# Altium PCB robotShield_PCB.PcbDoc
Units mm, origin at the board's own origin, x right, y up, seen from the top; angles counter-clockwise.
Board outline 80 x 60 mm, 2 copper layers (Top Layer, Bottom Layer), stack 1.541 mm thick; 63 components, 39 nets, 212 pads, 127 vias.
Unrouted connection lines stored in the file: 53.
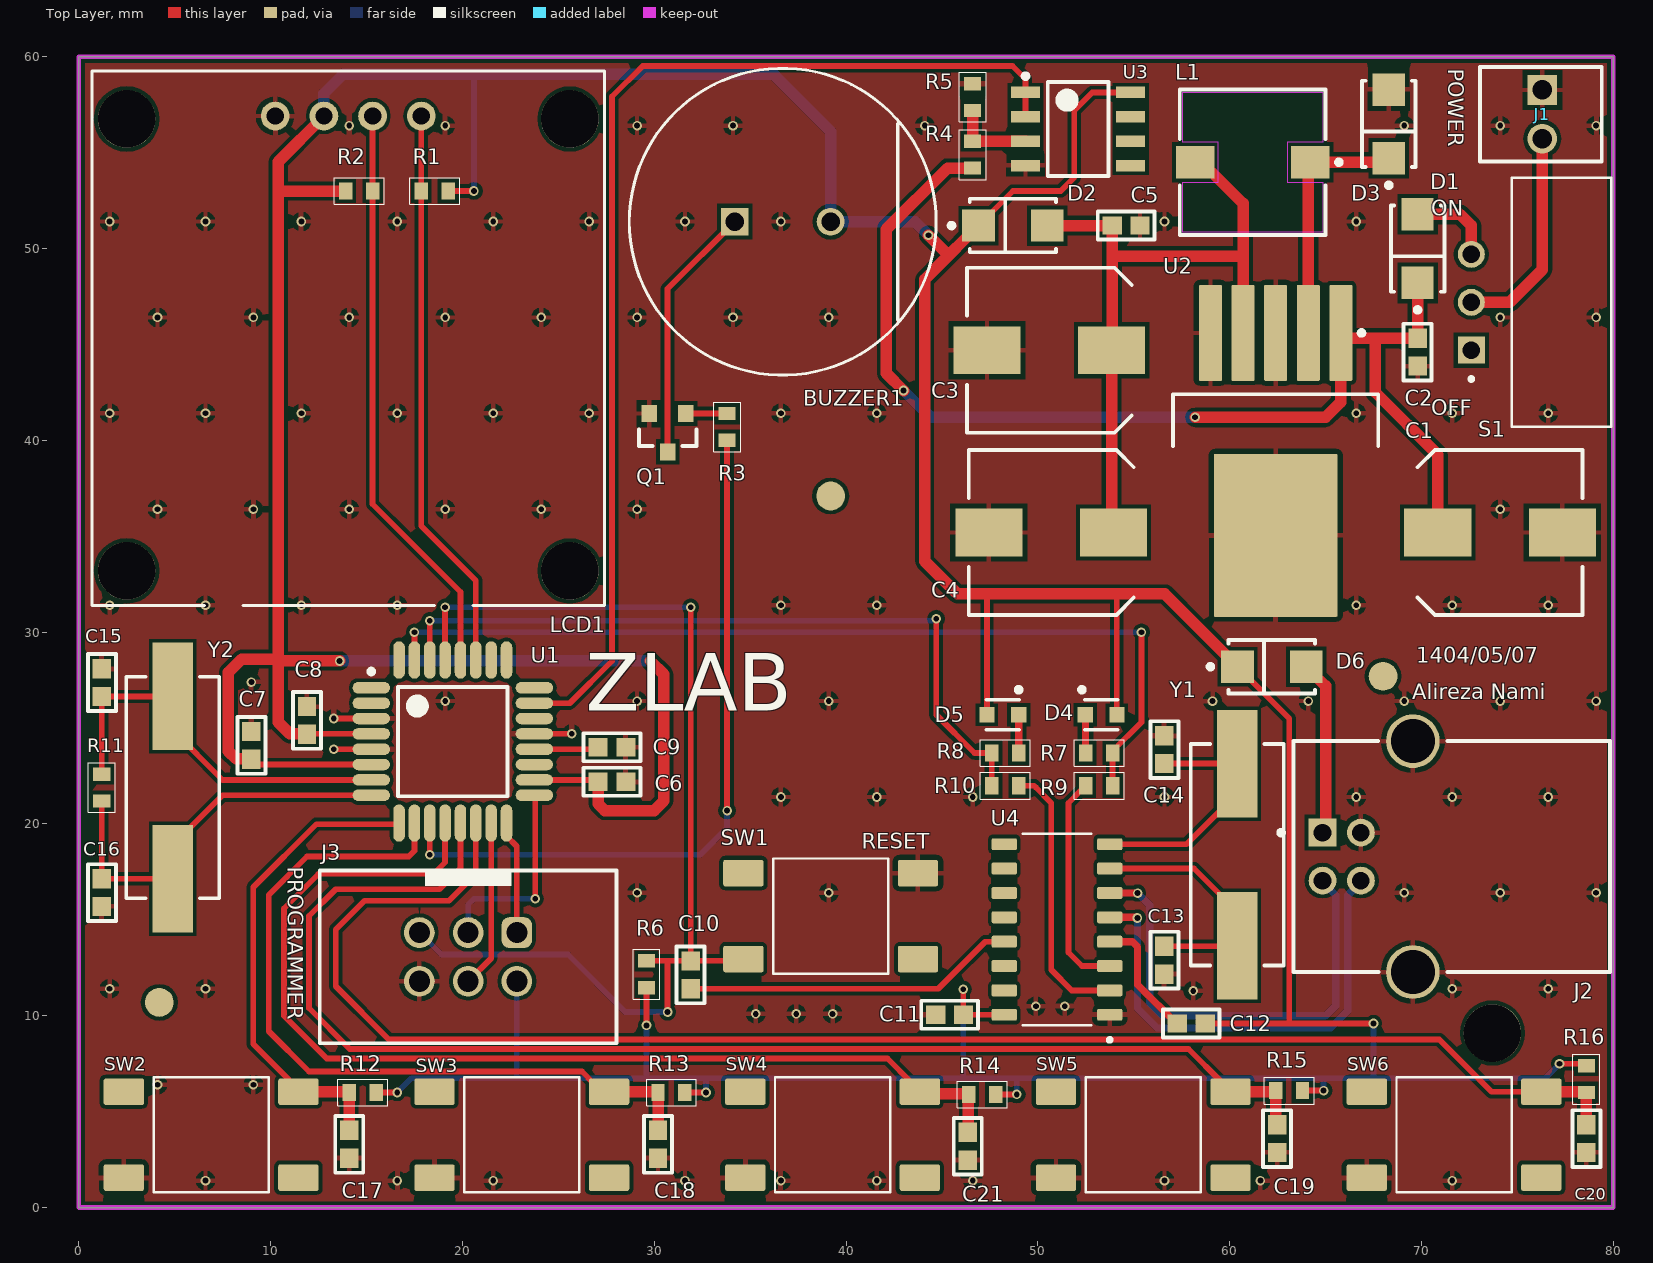
[diagram p0: Top Layer view]
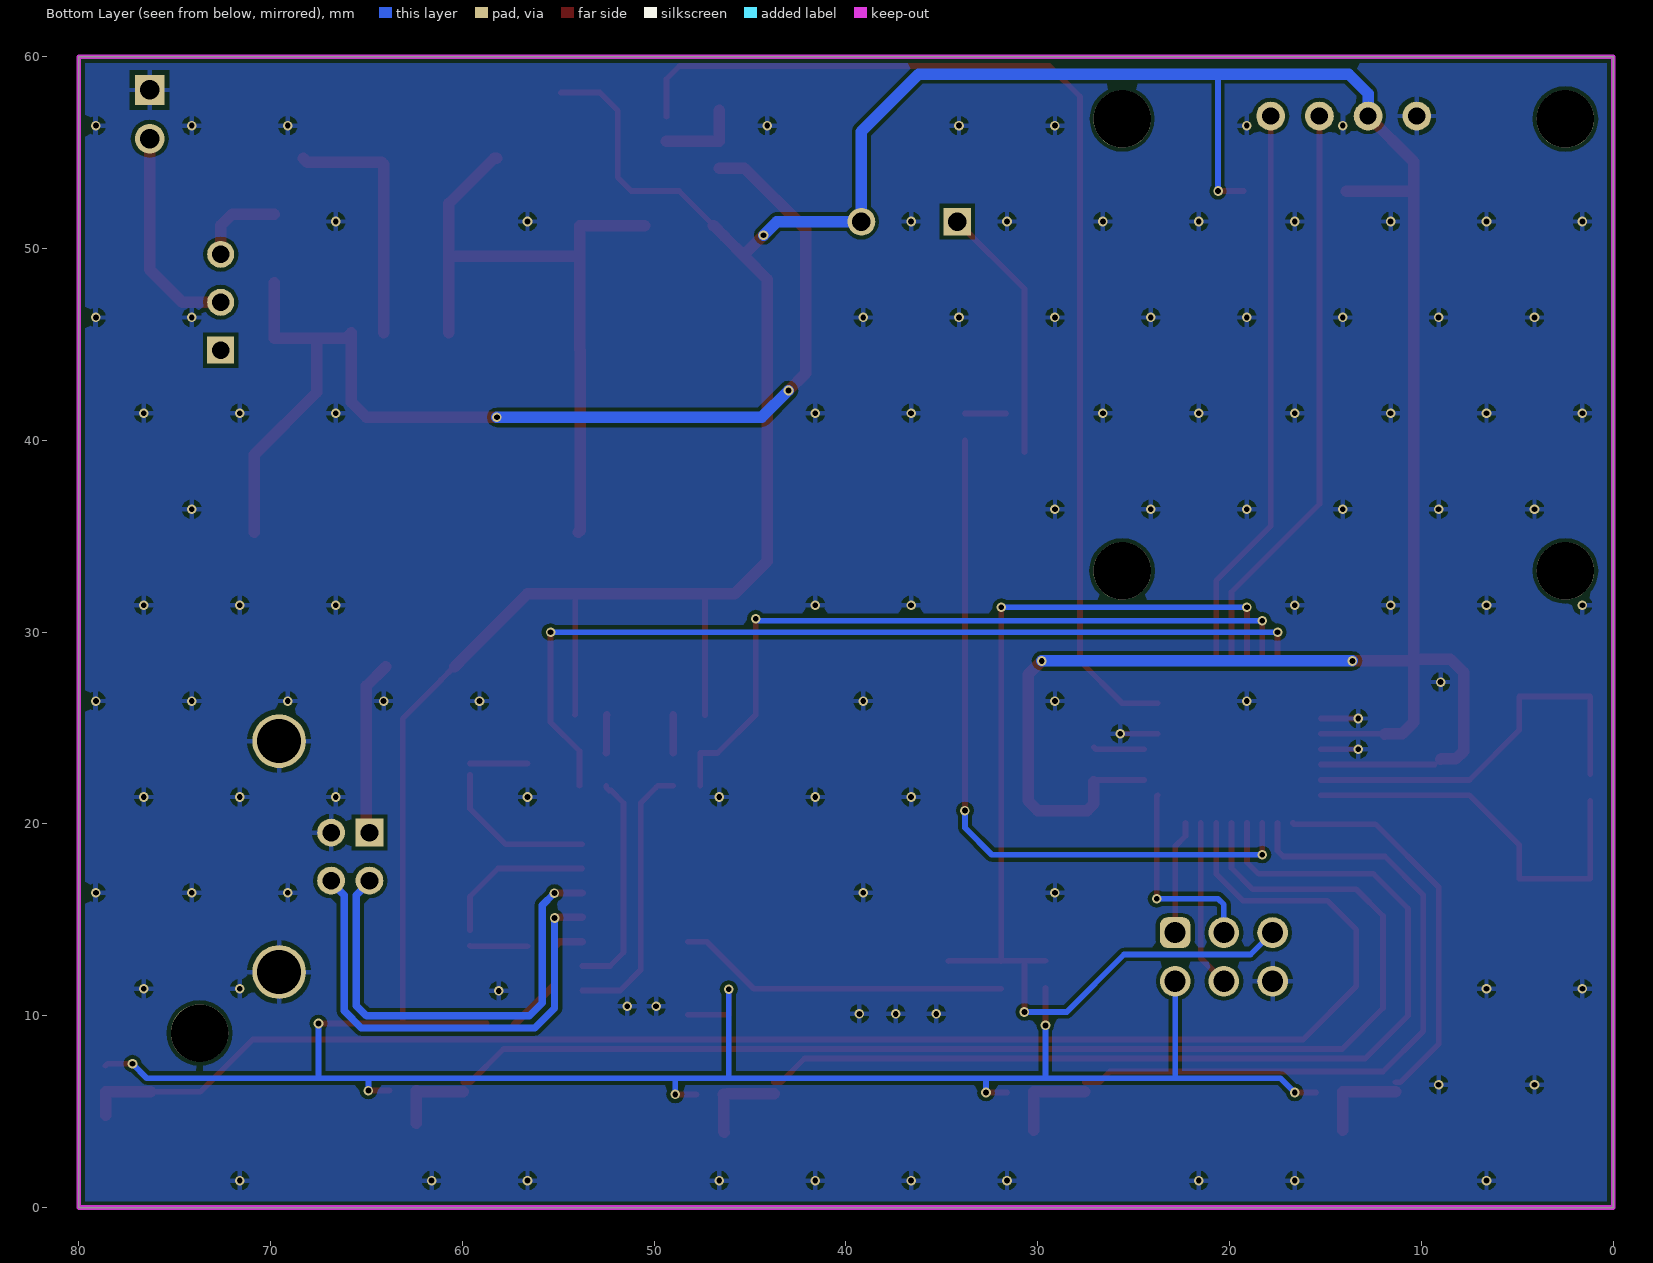
[diagram p1: Bottom Layer view, seen from below]
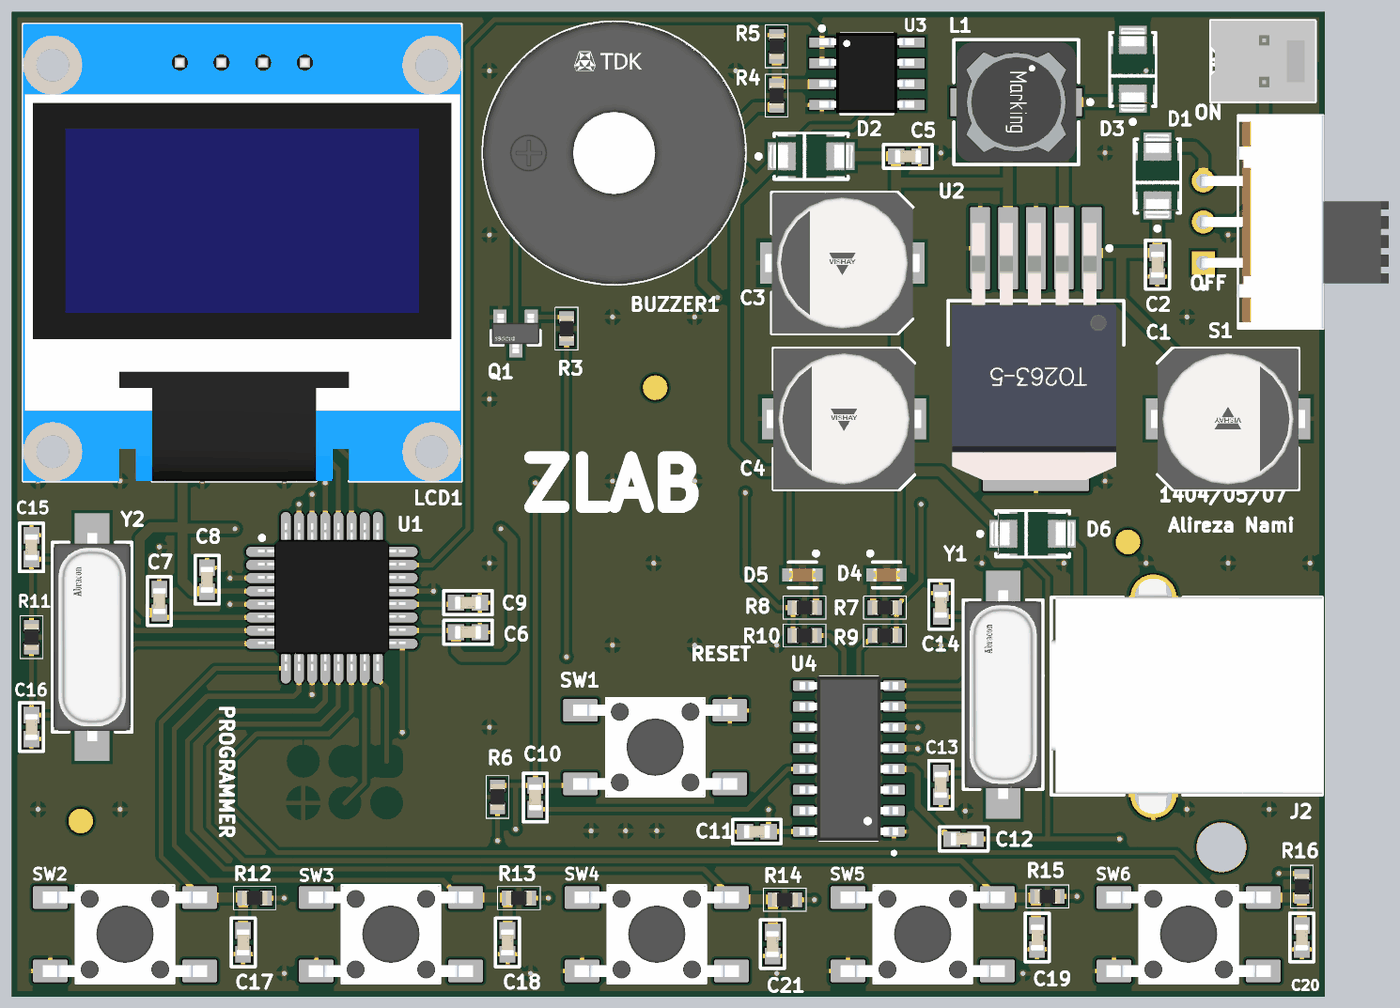
[diagram p2: 3D render of the assembled board from above, using the file's embedded part models]

## Layer stack, top to bottom
Top Solder: solder mask 0.0102, Solder Resist, Dk 3.5
Top Layer: signal copper 0.0356
Dielectric 1: dielectric 1.4696, FR-4, Dk 4.8
Bottom Layer: signal copper 0.0356
Bottom Solder: solder mask 0.0102, Solder Resist, Dk 3.5

## Board outline
0,0 0,60 80,60 80,0

## Design rules (kind name [scope] priority, off if disabled: settings)
Clearance [All] p1: gap=0.2 ignorepadtopadclearanceinfootprint=FALSE
DiffPairsRouting [All] p1: maxlimit=0.254 minlimit=0.254 mostfreqgap=0.254 toplayer_minwidth=0.381 toplayer_maxwidth=0.381 toplayer_prefwidth=0.381 bottomlayer_minwidth=0.381 bottomlayer_maxwidth=0.381 bottomlayer_prefwidth=0.381 maxuncoupledlength=12.7
HoleSize [All] p1: absolutevalues=TRUE maxlimit=3 minlimit=0.2 maxpercent=80.000 minpercent=20.000
MinimumSolderMaskSliver [All] p1: minsoldermaskwidth=0.05
PolygonConnect [All] p1: connectstyle=Relief reliefconductorwidth=0.254 reliefentries=4 polygonreliefangle="90 Angle" airgapwidth=0.254
RoutingVias [All] p1: holewidth=0.3 width=0.5 viastyle="Through Hole" minholewidth=0.3 minwidth=0.5 maxholewidth=0.4 maxwidth=0.6
SilkToSolderMaskClearance [IsPad] p1: minsilkscreentomaskgap=0.05 clearancetoexposedcopper=TRUE
SolderMaskExpansion [All] p1: expansion=0.102 istentingtop=FALSE
SupplyNets "Schematic Supply Nets_2" [InNet('GND')] p1: voltage=0.000
SupplyNets "Schematic Supply Nets_1" [InNet('+12V')] p2: voltage=0.000
SupplyNets "Schematic Supply Nets" [InNet('+5V')] p3: voltage=0.000
Width [All] p1: maxlimit=0.6 minlimit=0.3 preferedwidth=0.3
26 further rules are at their usual default settings.

## Classes and differential pairs
differential pair UD: +UD_P -UD_N

## Components (designator, comment, footprint, x,y, rotation, side; value= is the part's Value field where it differs from the comment)
BUZZER1 "SDC1610M5-01" BUZZER 36.7,51.4 r0 top
C1 "MAL215376101E3" CE-8X10MM 74.1,35.2 r180 top
C2 "CGA3E2X7R1H104K080AA" C0603 69.8,44.6 r270 top
C3 "MAL215376101E3" CE-8X10MM 50.6,44.7 r0 top
C4 "MAL215376101E3" CE-8X10MM 50.7,35.2 r0 top
C5 "CGA3E2X7R1H104K080AA" C0603 54.6,51.2 r0 top
C6 "CGA3E2X7R1H104K080AA" C0603 27.8,22.2 r0 top
C7 "CGA3E2X7R1H104K080AA" C0603 9,24.1 r90 top
C8 "CGA3E2X7R1H104K080AA" C0603 11.9,25.4 r90 top
C9 "CGA3E2X7R1H104K080AA" C0603 27.8,24 r180 top
C10 "CGA3E2X7R1H104K080AA" C0603 31.9,12.134 r90 top
C11 "CGA3E2X7R1H104K080AA" C0603 45.4,10.055 r180 top
C12 "CGA3E2X7R1H104K080AA" C0603 58,9.6 r0 top
C13 "C0603C160J3GACTU" C0603 56.6,12.9 r90 top value=16pF
C14 "C0603C160J3GACTU" C0603 56.6,23.876 r270 top value=16pF
C15 "C0603C180J3GACTU" C0603 1.204,27.376 r90 top value=18pF
C16 "C0603C180J3GACTU" C0603 1.204,16.424 r270 top value=18pF
C17 "CGA3E2X7R1H104K080AA" C0603 14.1,3.3 r270 top
C18 "CGA3E2X7R1H104K080AA" C0603 30.2,3.3 r270 top
C19 "CGA3E2X7R1H104K080AA" C0603 62.475,3.6 r270 top
C20 "CGA3E2X7R1H104K080AA" C0603 78.6,3.6 r270 top
C21 "CGA3E2X7R1H104K080AA" C0603 46.35,3.2 r270 top
D1 "MRA4007T3G" SMA 69.8,50 r90 top
D2 "SS14" SMA 48.7,51.2 r0 top
D3 "SS14" SMA 68.3,56.5 r90 top
D4 "SML-D12U1WT86" LED_RED_0603 53.3,25.7 r0 top
D5 "SML-D12U1WT86" LED_RED_0603 48.175,25.688 r180 top
D6 "SS14" SMA 62.2,28.2 r0 top
J1 "2Pin" MOLX-2P-2.54MM 76.3,57 r270 top
J2 "A-USBSB" USBS-B 67.2,18.3 r90 top
J3 "61200621621" ICSP -1249.7,-1256.93 r180 top
L1 "SRR0745A-331M" WE-PD_7332R 61.2,54.5 r270 top value=330uH
LCD1 "OLED-0.96Inch" OLED 2.5,33.2 r0 top
Q1 "MMBT2222A-7-F" SOT23 30.7,40.4 r270 top
R1 "RC0603JR-0710KL" R0603 18.56,53 r0 top value=10K
R2 "RC0603JR-0710KL" R0603 14.62,53 r180 top value=10K
R3 "RC0603JR-071KL" R0603 33.8,40.7 r270 top
R4 "RC0603JR-0720KL" R0603 46.6,54.9 r270 top value=20K
R5 "RC0603JR-0710KL" R0603 46.6,57.9 r270 top value=10K
R6 "RC0603JR-0710KL" R0603 29.6,12.16 r270 top value=10K
R7 "RC0603JR-071KL" R0603 53.2,23.7 r180 top
R8 "RC0603JR-071KL" R0603 48.3,23.7 r0 top
R9 "RC0603JR-071KL" R0603 53.2,22 r0 top
R10 "RC0603JR-071KL" R0603 48.3,22 r180 top
R11 "RC0603JR-071ML" R0603 1.204,21.9 r90 top value=1M
R12 "RC0603JR-0710KL" R0603 14.8,6 r0 top value=10K
R13 "RC0603JR-0710KL" R0603 30.9,6 r0 top value=10K
R14 "RC0603JR-0710KL" R0603 47.1,5.9 r0 top value=10K
R15 "RC0603JR-0710KL" R0603 63.1,6.1 r0 top value=10K
R16 "RC0603JR-0710KL" R0603 78.6,6.7 r90 top value=10K
S1 "Slide Switch" SLIDE_SWITCH_RIGHT 72.6,44.7 r90 top
SW1 "222AMVBAR" TS_6X6X5 39.2,15.2 r0 top
SW2 "222AMVBAR" TS_6X6X5 6.9,3.8 r180 top
SW3 "222AMVBAR" TS_6X6X5 23.1,3.8 r180 top
SW4 "222AMVBAR" TS_6X6X5 39.3,3.8 r180 top
SW5 "222AMVBAR" TS_6X6X5 55.5,3.8 r180 top
SW6 "222AMVBAR" TS_6X6X5 71.7,3.8 r180 top
U1 "ATmega328P-AU" TQFP32 19.5,24.3 r0 top
U2 "LM2575SX-5.0/NOPB" DPAK-5 62.4,39.302 r270 top
U3 "LM358ADR2G" SOIC-8 52.1,56.235 r0 top
U4 "CH340G" SOIC-16 51,14.5 r180 top
Y1 "LFXTAL003210BULK" XTAL-SMD 60.4,18.4 r90 top
Y2 "ABLS-16.000MHZ-K4T" XTAL-SMD 4.9,21.9 r90 top

## Footprints (in the part's own frame and the unit in brackets; to place one, negate y for a bottom-side part, rotate by r counter-clockwise, add the part's x,y. Pads: shape width x height; smd on the part's side, far side on the other; paste and mask are expansions set on the pad)
BUZZER [mm]
  rect 1.45x1.45 hole 0.95 paste-2539.97 mask+0: 1(-2.5,0)
  round 1.45 hole 0.95 paste-2539.97 mask+0: 2(2.5,0)
  silkscreen extent -8,-8 8,8, body extent -8.1,-8.1 8.1,8.1, height 0.25
C0603 [mm]
  rect 1.007x0.958 smd paste+0 mask+0.105: 1(-0.726,0) 2(0.726,0)
  silkscreen extent -1.48,-0.73 1.48,0.73, body extent -1.48,-0.73 1.48,0.73, height 0.25
CE-8X10MM [mm]
  rect 3.5x2.5 smd paste+0 mask+0: 1(-3.25,0) 2(3.25,0)
  silkscreen extent -4.3,-4.3 4.3,4.3, body extent -5.1,-4.4 5.1,4.4, height 0.25
DPAK-5 [mm] "DPAK, 5-Leads, Body 10.65x9.65mm, Pitch 1.7mm, IPC Low Density"
  rrect10% 5x1.2 smd: 1(-6.3,3.4) 2(-6.3,1.7) 3(-6.3,0) 4(-6.3,-1.7) 5(-6.3,-3.4)
  rrect2% 8.5x6.45 smd: 6(4.25,0)
  silkscreen extent -6.42,-5.35 -0.4,5.35, body extent -7.84,-5.1 7.83,4.9, height 4.81
ICSP [mm] "6 pins, straight, gold plating"
  rrect50% 1.6x1.6 hole 1.1: 1(-1272.54,-1271.27)
  round 1.6 hole 1.1: 2(-1272.54,-1268.73) 3(-1270,-1271.27) 4(-1270,-1268.73) 5(-1267.46,-1271.27) 6(-1267.46,-1268.73)
  silkscreen extent -1277.74,-1274.5 -1262.26,-1265.5, body extent -1277.64,-1274.43 -1262.36,-1265.25, height 9.13
LED_RED_0603 [mm]
  rect 0.8x0.8 smd paste+0 mask+0: 1(-0.825,0) 2(0.825,0)
  silkscreen extent -1.12,-0.79 0.85,1.42, body extent -1.33,-0.55 1.33,0.55, height 0.25
MOLX-2P-2.54MM [mm] "THD, 2-Leads, Body 6.35x4.93mm, Pitch 2.54mm"
  rect 1.55x1.55 hole 1.02: 1(-1.27,0)
  round 1.55 hole 1.02: 2(1.27,0)
  silkscreen extent -2.46,-3.25 2.46,3.1, body extent -2.46,-3.25 2.46,3.1, height 10.66
OLED [mm]
  round 1.5 hole 0.9: 1(7.741,23.709) 2(10.281,23.709) 3(12.82,23.709) 4(15.36,23.709)
  round 3 hole 3 mask+0: ""(0,0) ""(0,23.56) ""(23.1,0) ""(23.1,23.56)
  silkscreen extent -1.8,-1.8 24.9,26.06, body extent -1.8,-1.8 24.9,26.06, height 5.07
R0603 [mm] "Chip Resistor, 2-Leads, Body 1.70x0.90mm, IPC Medium Density"
  rect 0.7x0.9 smd: 1(-0.7,0) 2(0.7,0)
  silkscreen extent -1.3,-0.7 1.3,0.7, body extent -0.77,-0.43 0.77,0.43, height 0.46
SLIDE_SWITCH_RIGHT [mm]
  rect 1.408x1.408 / inner round 1.408 / far side rect 1.408x1.408 hole 0.9: 1(0,0)
  round 1.408 hole 0.9: 2(2.5,0) 3(5,0)
  silkscreen extent -4,-7.3 9,0.1, body extent -4,-11.3 9,0.2, height 6.1
SMA [mm]
  rect 1.7x1.68 smd paste+0 mask+0: 1(-1.79,0) 2(1.79,0)
  silkscreen extent -3.32,-1.4 2.25,1.4, body extent -2.74,-1.5 2.74,1.5, height 0.25
SOIC-8 [mm] "SOIC, 8-Leads, Body 4.9x3.9mm, Pitch 1.27mm"
  rect 1.52x0.6 smd: 1(-2.74,1.905) 2(-2.74,0.635) 3(-2.74,-0.635) 4(-2.74,-1.905) 5(2.74,-1.905) 6(2.74,-0.635) 7(2.74,0.635) 8(2.74,1.905)
  silkscreen extent -2.86,-2.45 1.58,2.88, body extent -2.89,-2.4 2.89,2.5, height 1.36
SOIC-16 [mm]
  rrect25% 1.31x0.62 smd: 1(-2.75,4.445) 2(-2.75,3.175) 3(-2.75,1.905) 4(-2.75,0.635) 5(-2.75,-0.635) 6(-2.75,-1.905) 7(-2.75,-3.175) 8(-2.75,-4.445) 9(2.75,-4.445) 10(2.75,-3.175) 11(2.75,-1.905) 12(2.75,-0.635) 13(2.75,0.635) 14(2.75,1.905) 15(2.75,3.175) 16(2.75,4.445)
  silkscreen extent -2.85,-5 1.78,5.85, body extent -3,-5 3,5, height 1.8
SOT23 [mm]
  rect 0.9x0.8 smd paste+0 mask+0: 1(-1,0.95) 2(-1,-0.95) 3(1,0)
  silkscreen extent -0.18,-1.5 0.7,1.5, body extent -1.55,-1.6 1.55,1.6, height 0.25
TQFP32 [mm] "Thin QFP, 32-Leads, Body 7x7mm, Pitch 0.8mm, IPC Low Density"
  oval 1.95x0.6 smd: 1(-4.25,2.8) 2(-4.25,2) 3(-4.25,1.2) 4(-4.25,0.4) 5(-4.25,-0.4) 6(-4.25,-1.2) 7(-4.25,-2) 8(-4.25,-2.8) 17(4.25,-2.8) 18(4.25,-2) 19(4.25,-1.2) 20(4.25,-0.4) 21(4.25,0.4) 22(4.25,1.2) 23(4.25,2) 24(4.25,2.8)
  oval 0.6x1.95 smd: 9(-2.8,-4.25) 10(-2,-4.25) 11(-1.2,-4.25) 12(-0.4,-4.25) 13(0.4,-4.25) 14(1.2,-4.25) 15(2,-4.25) 16(2.8,-4.25) 25(2.8,4.25) 26(2,4.25) 27(1.2,4.25) 28(0.4,4.25) 29(-0.4,4.25) 30(-1.2,4.25) 31(-2,4.25) 32(-2.8,4.25)
  silkscreen extent -4.37,-2.85 2.85,3.77, body extent -4.5,-4.45 4.5,4.55, height 1.1
TS_6X6X5 [mm]
  rrect15% 2.1x1.38 smd: 1(-4.55,2.24) 2(-4.55,-2.24) 3(4.55,2.24) 4(4.55,-2.24)
  silkscreen extent -3,-3 3,3, body extent -5,-3 5,3, height 5.07
USBS-B [mm] "USB-B, 4-Leads, Body 16.5x12.04mm"
  rect 1.45x1.45 hole 0.92: 1(1.25,2.355)
  round 1.45 hole 0.92: 2(-1.25,2.355) 3(-1.25,0.355) 4(1.25,0.355)
  round 2.8 hole 2.3: 5(6.02,-2.355) 6(-6.02,-2.355)
  silkscreen extent -6.02,-12.63 6.02,4.64, body extent -7.4,-12.65 7.5,3.85, height 11.01
WE-PD_7332R [mm] "SMT Shielded Power Inductor, 2-leads, body 7.3x7.3mm"
  rect 1.7x2 smd: 1(0,3) 2(0,-3)
  Top Layer keep-out region: 3.65,-3.65 1.05,-3.65 1.05,-1.8 -1.05,-1.8 -1.05,-3.65 -3.65,-3.65 -3.65,3.65 -1.05,3.65 -1.05,1.8 1.05,1.8 1.05,3.65 3.65,3.65
  silkscreen extent -3.8,-3.8 3.8,4.63, body extent -3.65,-3.65 3.65,3.65, height 3.22
XTAL-SMD [mm]
  rect 5.6x2.1 smd paste+0 mask+0: 1(-4.75,0) 2(4.75,0)
  silkscreen extent -5.77,-2.42 5.77,2.42, body extent -7.65,-2.52 7.65,2.52, height 0.25

## Part data
BUZZER1: library part BUZZER-5V, "AUDIO MAGNETIC INDICATOR 4-8V TH", Frequency=2.4kHz, Max Operating Temperature=70°C, Max Supply Current=30mA, Min Operating Temperature=-10°C, Nominal Supply Voltage (DC)=5V, Diameter=16mm, Height=10mm, Input Type=DC, Lead Free="Lead Free", Mount="Through Hole", Number of Pins=2, Number of Terminals/Pins=2, Operating Supply Current=30mA, Packaging=Tray, Sensing Method=Magnetic, Series=SDC, Termination="PC Pins", Voltage Rating=5V
C1 C3 C4: library part CE-100uF-25V, "MAL215376101E3 Cap Aluminum 100uF 25V 20% (8 X 10mm) SMD 0.5 Ohm 180mA 3000h 105C Blister T/R", Capacitance=100µF, Case/Package=Radial, Dielectric Material=Aluminium, ESR (Equivalent Series Resistance)=500mΩ, Leakage Current=22µA, Max Operating Temperature=105°C, Min Operating Temperature=-55°C, Ripple Current=180mA, Tolerance=20%, Voltage=25V, Diameter=8mm, Dissipation Factor=16%, Height=10mm, Height - Seated (Max)=10.4902mm, Lead Free="Lead Free", Life (Hours)=2000hours, Mount="Surface Mount", NexarPartId=42636023, Number of Pins=2, Packaging="Cut Tape", Polarity=Polar, Radiation Hardening=No, REACH SVHC=Unknown, Ripple Current (AC)=180mA, RoHS=Compliant, Schedule B="8532220020, 8532220020|8532220020, 8532220020|8532220020|8532220020, 8532220020|8532220020|8532220020|8532220020", Termination=SMD/SMT, Voltage Rating=25V, Voltage Rating (AC)=25V, Voltage Rating (DC)=25V, Width=8.6mm
C2 C5 C6 C7 C8 C9 C10 C11 C12 C17 C18 C19 C20 C21: library part 100N-50V-X7R-0603, "Cap Ceramic 100nF 50V X7R 10% Pad SMD 0603 +125°C Automotive T/R", Capacitance=100nF, Case Code (Imperial)=0603, Case Code (Metric)=1608, Dielectric=X7R, Max Operating Temperature=125°C, Min Operating Temperature=-55°C, Package Quantity=1, Ratings=AEC-Q200, Tolerance=10%, Voltage=50V, Case/Package=0603, Composition=Ceramic, Depth=0.8mm, Height=0.8mm, Lead Free="Lead Free", Length=1.6mm, Mount="Surface Mount", Packaging="Tape and Reel", Radiation Hardening=No, REACH SVHC="No SVHC", Termination=SMD/SMT, Thickness=0.035inch, Voltage Rating=50V, Voltage Rating (DC)=50V, Weight=7.1E-05oz, Width=0.8mm
C13 C14: library part 16P-25V-C0G-0603, "16 pF ±5% 25V Ceramic Capacitor C0G, NP0 0603 (1608 Metric)", Manufacturer=KEMET, Supplier Part Number=399-C0603C160J3GACTUTR-ND, Manufacturer Part Number=C0603C160J3GACTU, Pricing="4000=0.05638 (USD)", RoHS=No, Supplier=Digikey
C15 C16: library part 18P-25V-C0G-0603, "0603 (1608METRIC) Ceramic Capacitor SMD Comm C0G 25V 18PF ±5% C0G NP0", Case Code (Imperial)=0603, Case Code (Metric)=1608, Dielectric=C0G, Dielectric Material=Ceramic, Manufacturer=KEMET, Max Operating Temperature=125°C, Min Operating Temperature=-55°C, Package Quantity=4000, Supplier Part Number=80-C0603C180J3G, Temperature Coefficient=30ppm/°C, Tolerance=5%, Voltage Rating=25V, Case/Package=0603, Category="Ceramic Capacitors", ComponentLink1Description=https://datasheet.ciiva.com/23984/1723858-23984097.pdf?src-supplier=Newark, ComponentLink1URL=https://datasheet.ciiva.com/23984/1723858-23984097.pdf?src-supplier=Newark, ComponentLink2Description=https://datasheet.ciiva.com/22752/1907778-22752151.pdf?src-supplier=Element14, ComponentLink2URL=https://datasheet.ciiva.com/22752/1907778-22752151.pdf?src-supplier=Element14, ComponentLink3Description=https://datasheet.ciiva.com/28453/1907778-28453241.pdf?src-supplier=Element14, ComponentLink3URL=https://datasheet.ciiva.com/28453/1907778-28453241.pdf?src-supplier=Element14, ComponentLink4Description=https://datasheet.ciiva.com/5421/kem-c1003-c0g-smd-5421693.pdf?src-supplier=Mouser, ComponentLink4URL=https://datasheet.ciiva.com/5421/kem-c1003-c0g-smd-5421693.pdf?src-supplier=Mouser, Construction=Flat, Depth=0.8mm, Height=0.8mm, Lead Free="Lead Free", Lead Pitch=0.7mm, Length=1.6mm, Manufacturer Part Number=C0603C180J3GACTU, Material=Ceramic, Mounting Technology="Surface Mount", Packaging="Tape and Reel", Pricing="1=0.23, 10=0.131, 50=0.131, 100=0.078, 1000=0.053, 10000=0.039 (USD)", Radiation Hardening=No, Reach SVHC Compliant=No, RoHS=Yes, RoHS Compliant=Yes, Series=C, Stock=8329, Supplier=Mouser, Termination=SMD/SMT, Thickness=0.034inch, Voltage Rating (DC)=25V, Width=0.031inch
D1: library part M7, "Surface Mount Standard Recovery Power Rectifier, 2-Pin SMA, Pb-Free, Tape and Reel", Manufacturer="On Semiconductor", ComponentLink1Description="Manufacturer URL", ComponentLink1URL=http://www.onsemi.com/, ComponentLink2Description=Datasheet, ComponentLink2URL=http://www.onsemi.com/pub_link/Collateral/MRA4003T3-D.PDF, ComponentLink3Description="Package Specification", ComponentLink3URL=http://www.onsemi.com/pub_link/Collateral/403D-02.PDF, DatasheetVersion="Rev. 9", IFSM Max (A)=30, IO(rec) Max (A)=1, Mounting Technology="Surface Mount", PackageDescription="2-Pin Small Molded Package, J-Bend Lead, Body 2.605 x 4.315 mm", PackageReference=SMA-2-403D-02, PackageVersion="Rev. G, 07/2012", Packing="Tape and Reel", PartNumber=MRA4007T3G, RoHS=TRUE, Type="Standard Recovery", VRRM Max (V)=1000
D2 D3 D6: "DIODE SCHOTTKY 40V 1A DO214AC", Forward Current=1A, Manufacturer=Vishay, Manufacturer Part Number=SS14-E3/61T, Max Junction Temp=+150°C, Max Repetitive Reverse Voltage=40V, Max Surge Forward Current=40A, Package=95400, Peak Reverse Current=0.2mA, Temperature="-65°C to +150°C", Temperature Range Low=-65°C, Automotive=No, Category=Diode, ComponentLink2Description=Datasheet, ComponentLink2URL=http://www.vishay.com/docs/88746/ss12.pdf, Device Class L1="Discrete Semiconductors", Device Class L2=Diodes, Device Class L3="Schottky Diodes", Digikey Description="DIODE SCHOTTKY 40V 1A DO214AC", Footprint Url=http://www.vishay.com/docs/95400/sma.pdf, Height=2.29mm, Lead Free=Yes, Mouser Description="SS14 Series 40 V 1 A Surface Mount Schottky Barrier Rectifier - DO-214AC (SMA)", Octopart=https://octopart.com/ss14-e3%2F61t-vishay-39552847, RoHS=TRUE, Standoff Height=0mm, Temperature Range High=+150°C
D4 D5: library part LED_RED_0603, "LED RED DIFFUSED 1608 SMD", Colour=Red, Forward Current=20mA, Forward Voltage=2.2V, Manufacturer=Rohm, Package=SML-D12, Power Dissipation=54mW, Reverse Voltage=5V, Temperature="-40°C to +85°C", Temperature Range High=+85°C, Temperature Range Low=-40°C, Automotive=No, Category=Diode, ComponentLink2Description=Datasheet, ComponentLink2URL=https://www.rohm.com/datasheet/SML-D12U1W/sml-d12x1-e, Device Class L1=Optoelectronics, Device Class L2=LEDs, Device Class L3=unset, Digikey Description="LED RED DIFFUSED 1608 SMD", Height=0.65mm, Lead Free=Yes, Led Orientation="Top View", Luminous Intensity=63mcd, Manufacturer Part Number=SML-D12U1WT86, Mouser Description="SML-D12 Series Red 0603 Diffused 63 mcd 2.2 V Surface Mount LED", Octopart=https://octopart.com/sml-d12u1wt86-rohm-70850259, RoHS=TRUE, Wavelength=620nm
J1: library part Header_2P_2.54mm, "Male Header, Pitch 2.54 mm, 1 x 2 Position, Height 10.67 mm, Tail Length 3.56 mm, 0 to 75 degC, RoHS, Bulk", Max Operating Temperature="75 degC", Min Operating Temperature="0 degC", Package Quantity=3000, PartNumber=22-23-2021, ComponentLink1Description="Manufacturer URL", ComponentLink1URL=http://www.molex.com/, ComponentLink2Description=Datasheet, ComponentLink2URL=https://datasheet.ciiva.com/19454/232266-19454304.pdf, Height="10.67 mm", Length="5.08 mm", Mount="Through Hole", Mounting Technology="Through Hole", PackageDescription="Male Header, Pitch 2.54 mm, 1 x 2 Position, Height 10.67 mm, Tail Length 3.56 mm", Packaging=Bulk, Pins=2, Radiation Hardening=No, REACH SVHC=Unknown, RoHSCompliant=True, Width="6.35 mm"
J2: "Connector Receptacle, USB Type B, Right Angle, -20 to 85 degC, 4-Pin THD, RoHS, Tray", Manufacturer="ASSMANN WSW", Package Description="4-Pin Through Hole Device, Body 16.5 x 12.04 mm", Package Reference=USBSB, Body Orientation=RightAngle, CAD Drawing=3DCADModel, Datasheet URL=https://datasheet.ciiva.com/11731/0900766b80da421f-11731321.pdf, Datasheet Version=12/2009, Gender=Female, Manufacturer URL=http://www.assmann.us/, Mounting Technology=ThroughHole, Mounting Type=ThroughHole, Number of Ports=1, Termination Method=Solder
J3: library part ICSP, "CONN HEADER VERT 6POS 2.54MM", Color=Black, Contact Resistance=20mΩ, Current Rating=3A, Insulation Resistance=1GΩ, Max Operating Temperature=105°C, Min Operating Temperature=-40°C, Operating Supply Voltage=250V, Connector Type="Male Pin", Contact Material=Copper, Contact Plating=Gold, Gender=Male, Insulation Material=PBT, Lead Pitch=2.54mm, Length=15.28mm, Mount="Through Hole", NexarPartId=32855456, Number of Contacts=6, Number of Pins=6, Number of Positions=6, Number of Rows=2, Orientation=Vertical, Pitch=2.54mm, REACH SVHC=Unknown, RoHS=Compliant, Row Spacing=2.54mm, Termination=Solder
L1: library part 330uH-0.34A, "Inductor Power Shielded Wirewound 330uH 20% 1KHz Ferrite 0.34A 1.5Ohm DCR Automotive T/R", Case/Package=Nonstandard, Current Rating=340mA, DC Resistance (DCR)=1.5R, Inductance Tolerance=20%, Manufacturer=Bourns, Max Operating Temperature=125°C, Min Operating Temperature=-40°C, Ratings=AEC-Q200, Saturation Current=400mA, Supplier Part Number=SRR0745A-331MCT-ND, Test Frequency=1kHz, Category="Fixed Inductors", ComponentLink1Description=https://datasheet.ciiva.com/46451/1865600-46451113.pdf?src-supplier=Element14, ComponentLink1URL=https://datasheet.ciiva.com/46451/1865600-46451113.pdf?src-supplier=Element14, ComponentLink2Description=https://datasheet.ciiva.com/48955/70480969-48955818.pdf?src-supplier=Allied+Electronics, ComponentLink2URL=https://datasheet.ciiva.com/48955/70480969-48955818.pdf?src-supplier=Allied+Electronics, Core Material=Ferrite, Height - Seated (Max)=0.185inch, Length=0.287inch, Manufacturer Part Number=SRR0745A-331M, Mounting Technology="Surface Mount", Packaging="Tape and Reel", Pricing="1=0.8, 10=0.66, 25=0.6108, 50=0.576, 100=0.543, 250=0.50232, 500=0.47364 (USD)", Reach SVHC Compliant=No, RMS Current (Irms)=340mA, RoHS=No, Series=SRR0745A, Shielding=Shielded, Stock=3891, Supplier=Digikey, Termination=SMD/SMT, Tolerance=20%, Width=0.287inch
LCD1: "Monochrome 0.96 128x64 OLED graphic display", Background Color=Black, Case/Package=Module, Manufacturer="Adafruit Industries", Manufacturer Part Number=326, Supplier Part Number=1528-1220-ND, Category="LCD, OLED, Graphic Displays", ComponentLink1Description=https://datasheet.ciiva.com/6967/1718446-6967825.pdf?src-supplier=Newark, ComponentLink1URL=https://datasheet.ciiva.com/6967/1718446-6967825.pdf?src-supplier=Newark, ComponentLink2Description=https://datasheet.ciiva.com/39121/2211952-39121704.pdf?src-supplier=Jameco, ComponentLink2URL=https://datasheet.ciiva.com/39121/2211952-39121704.pdf?src-supplier=Jameco, Diagonal Size=0.96inch, Interface=I2C,SPI, Pricing="1=17.5 (USD)", Resolution (height)=64pixel, Resolution (width)=128pixel, RoHS=Yes, Series=-, Stock=284, Supplier=Digikey
Q1: library part MMBT2222A, "TRANS NPN 40V 0.6A SMD SOT23-3", Case/Package=SOT-23, Collector Base Voltage (VCBO)=75V, Collector Emitter Breakdown Voltage=40V, Collector Emitter Saturation Voltage=1V, Continuous Collector Current=600mA, Current=1A, Emitter Base Voltage (VEBO)=6V, Frequency=300MHz, Max Operating Temperature=150°C, Max Power Dissipation=300mW, Min Operating Temperature=-55°C, Package Quantity=3000, Power Dissipation=350mW, Collector Emitter Voltage (VCEO)=40V, Contact Plating=Tin, Current Rating=600mA, Element Configuration=Single, Gain Bandwidth Product=300MHz, Height=1mm, hFE Min=100, Lead Free="Lead Free", Length=3.05mm, Max Breakdown Voltage=40V, Max Collector Current=600mA, Max Frequency=300MHz, Mount="Surface Mount", Number of Elements=1, Number of Pins=3, Packaging="Tape and Reel", Polarity=NPN, Radiation Hardening=No, REACH SVHC="No SVHC", Termination=SMD/SMT, Transition Frequency=300MHz, Voltage=40V, Voltage Rating (DC)=40V, Weight=0.000282oz, Width=1.4mm
R1 R2 R5 R6 R12 R13 R14 R15 R16: library part 10K-5%-0603, "100Mw Thick Film Resistors 100Ppm/ 5% 10K 0603 Chip Resistor Surface Mount Rohs", Case/Package=0603, Manufacturer=Yageo, Max Operating Temperature=155°C, Max Power Dissipation=100mW, Min Operating Temperature=-55°C, Supplier Part Number=7356926, Temperature Coefficient=100ppm/°C, Tolerance=5%, Voltage Rating (AC)=50V, Category="Chip SMD Resistors", ComponentLink1Description=https://datasheet.ciiva.com/2452/pyu-rc-group-51-rohs-l-10-2452848.pdf?src-supplier=Digikey, ComponentLink1URL=https://datasheet.ciiva.com/2452/pyu-rc-group-51-rohs-l-10-2452848.pdf?src-supplier=Digikey, Lead Free="Lead Free", Manufacturer Part Number=RC0603JR-0710KL, Number of Terminations=2, Pricing="5000=0.0009, 25000=0.0009, 100000=0.0008, 200000=0.0008, 500000=0.0008 (USD)", Reach SVHC Compliant=Unknown, RoHS=Yes, RoHS Compliant=Yes, Series=RC, Stock=1475000, Supplier="Future Electronics"
R3 R7 R8 R9 R10: library part 1K-5%-0603, "Chip Resistor, 1 KOhm, +/- 5%, 0.063 W, -55 to 155 degC, 0603 (1608 Metric), RoHS, Tape and Reel", Manufacturer=Yageo, Package Description="2-Pin Surface Mount Device, Body 1.6 x 0.8 mm", Package Reference=603, Power Rating=100mW, Resistance=1K, Resistance Tolerance=±5%, Resistor Case Style=0603[1608Metric], Resistor Element Type=ThickFilm, Temperature Coefficient=±100ppm/degC, Voltage Rating=50V, Automotive Qualification Standard=-, Datasheet URL=https://datasheet.ciiva.com/2452/pyu-rc0603-51-rohs-l-4-2452848.pdf, Datasheet Version="Rev. 4, 04/2009", Manufacturer URL=http://www.yageo.com/, MSL=MSL1-Unlimited, Packaging=CutTape, Product Range=RCSeries, SVHC=ToBeAdvised
R4: library part 20K-5%-0603, "Res Thick Film 0603 20K Ohm 5% 0.1W(1/10W) ±100ppm/C Pad SMD T/R", Case Code (Imperial)=0603, Case Code (Metric)=1608, Manufacturer=Yageo, Max Operating Temperature=155°C, Max Power Dissipation=100mW, Min Operating Temperature=-55°C, Package Quantity=1, Resistance Tolerance=5%, Resistor Type="Thick Film", Temperature Coefficient=100ppm/°C, Voltage Rating=50V, Case/Package=0603, Category="Chip SMD Resistors", ComponentLink1Description=https://datasheet.ciiva.com/2453/pyu-r-int-thick-7-2453163.pdf?src-supplier=Digikey, ComponentLink1URL=https://datasheet.ciiva.com/2453/pyu-r-int-thick-7-2453163.pdf?src-supplier=Digikey, ComponentLink2Description=https://datasheet.ciiva.com/2453/pyu-r-int-thick-7-2453164.pdf?src-supplier=Digikey, ComponentLink2URL=https://datasheet.ciiva.com/2453/pyu-r-int-thick-7-2453164.pdf?src-supplier=Digikey, ComponentLink3Description=https://datasheet.ciiva.com/2453/pyu-r-int-thick-7-2453165.pdf?src-supplier=Digikey, ComponentLink3URL=https://datasheet.ciiva.com/2453/pyu-r-int-thick-7-2453165.pdf?src-supplier=Digikey, ComponentLink4Description=https://datasheet.ciiva.com/46394/443971-46394997.pdf?src-supplier=Element14, ComponentLink4URL=https://datasheet.ciiva.com/46394/443971-46394997.pdf?src-supplier=Element14, Features="Moisture Resistant", Height=0.022inch, Lead Free="Lead Free", Length=0.063inch, Manufacturer Part Number=RC0603JR-0720KL, Number of Terminations=2, Packaging="Tape and Reel", Pins=2, Power Rating=100mW, Pricing="5000=0.0009 (USD)", Reach SVHC Compliant=No, RoHS=Yes, RoHS Compliant=Yes, Series=RC, Stock=90000, Supplier="Arrow Electronics", Supplier Part Number=RC0603JR-0720KL, Termination=SMD/SMT, Tolerance=5%, Voltage Rating (DC)=50V, Width=0.031inch
R11: library part 1M-5%-0603, "100Mw Thick Film Resistors 100Ppm/ 5% 1M 0603 Chip Resistor Surface Mount Rohs", Case Code (Imperial)=0603, Case Code (Metric)=1608, Manufacturer=Yageo, Max Operating Temperature=155°C, Max Power Dissipation=100mW, Min Operating Temperature=-55°C, Package Quantity=5000, Resistance Tolerance=5%, Resistor Type="Thick Film", Temperature Coefficient=100ppm/°C, Voltage Rating=50V, Case/Package=0603, Category="Chip SMD Resistors", ComponentLink1Description=https://datasheet.ciiva.com/46395/443971-46395067.pdf?src-supplier=Element14, ComponentLink1URL=https://datasheet.ciiva.com/46395/443971-46395067.pdf?src-supplier=Element14, ComponentLink2Description=https://datasheet.ciiva.com/7746/443971-7746463.pdf?src-supplier=Element14, ComponentLink2URL=https://datasheet.ciiva.com/7746/443971-7746463.pdf?src-supplier=Element14, ComponentLink3Description=https://datasheet.ciiva.com/12555/rc0603-272842-12555342.pdf?src-supplier=Mouser, ComponentLink3URL=https://datasheet.ciiva.com/12555/rc0603-272842-12555342.pdf?src-supplier=Mouser, ComponentLink4Description=https://datasheet.ciiva.com/8883/pyu-rc0603-51-rohs-l-4-8883053.pdf?src-supplier=Avnet, ComponentLink4URL=https://datasheet.ciiva.com/8883/pyu-rc0603-51-rohs-l-4-8883053.pdf?src-supplier=Avnet, Construction=Rectangular, Contact Plating=Tin,Matte, Depth=0.8mm, Features="Moisture Resistant", Height=0.45mm, Lead Free=5697LeadFree, Length=1.6mm, Manufacturer Part Number=RC0603JR-071ML, Military Standard=Not, Number of Terminations=2, Packaging="Tape and Reel", Pins=2, Power Rating=100mW, Pricing="5000=0.00088, 10000=0.00087, 20000=0.00086, 30000=0.00084, 40000=0.00083 (USD)", Reach SVHC Compliant=No, RoHS=Yes, RoHS Compliant=Yes, Series=RC, Stock=1030000, Supplier=Avnet, Supplier Part Number=RC0603JR-071ML, Termination=SMD/SMT, Tolerance=5%, Voltage Rating (AC)=50V, Voltage Rating (DC)=50V, Width=0.8mm
S1: library part SPDT, "Slide Switch SPDT Through Hole, Right Angle", Package=None, Check_prices=https://www.snapeda.com/parts/STS121RA04/TE+Connectivity+ALCOSWITCH+Switches/view-part/?ref=eda, MF="TE Connectivity", MP=STS121RA04, SnapEDA_Link=https://www.snapeda.com/parts/STS121RA04/TE+Connectivity+ALCOSWITCH+Switches/view-part/?ref=snap
SW1 SW2 SW3 SW4 SW5 SW6: library part TactileSwitch_6x6x5, "SWITCH TACTILE SPST-NO 0.05A 12V", Manufacturer_Name="CTS Components", Copyright="Copyright (C) 2025 Ultra Librarian. All rights reserved.", Manufacturer_Part_Number=222AMVBAR, RefDes=RefDes, Type="Tactile Switches"
U1: "8-bit AVR Microcontroller, 32KB Flash, 1KB EEPROM, 2KB SRAM, 32-pin TQFP, Industrial Grade (-40°C to 85°C)", Code_JEDEC=MS-026-ABA, ComponentLink1Description="Manufacturer URL", ComponentLink1URL=http://www.atmel.com/, ComponentLink2Description="ATmega48A/48PA/88A/88PA/168A/168PA/328/328P Datasheet", ComponentLink2URL=http://www.atmel.com/dyn/resources/prod_documents/doc8271.pdf, ComponentLink3Description="ATmega48A/48PA/88A/88PA/168A/168PA/328/328P Summary", ComponentLink3URL=http://www.atmel.com/dyn/resources/prod_documents/8271S.pdf, DatasheetVersion="revD, May-2011", PackageDescription="32-Lead, 7x7x1.0 mm Body, 0.8mm Lead Pitch, Thin Profile Plastic Quad Flat Package (TQFP)", PackageReference=32A, PackageVersion="revC, Oct-2010", RevisionNote="DatasheetVersion & PackageVersion updated. URLs added."
U2: library part LM2575-5.0V, "SIMPLE SWITCHER® 1A Step-Down Voltage Regulator, 5-pin TO-263, Pb-Free", Manufacturer="Texas Instruments", PackageTopMarking="NSUZXYTTE#*LM2575S*-5.0 P+", PowerWise=N, Code_JEDEC=MO-169-AB, ComponentLink1Description="Datasheet URL", ComponentLink1URL=http://www.ti.com/general/docs/lit/getliterature.tsp?genericPartNumber=LM2575-N&fileType=pdf, CompType=Switcher, PackageDescription="TO-263, Molded, .400 x .390 x .180in, 5 Lead, .067in Pitch, Surface Mount", PackageReference=KTT0005B, PinCount=5, RoHS=Y
U3: library part LM358, "Single Supply Dual Operational Amplifier, 3 to 32 V, 0 to 70 degC, 8-Pin SOIC, Pb-Free, Tape and Reel", Manufacturer="On Semiconductor", ComponentLink1Description="Manufacturer URL", ComponentLink1URL=http://www.onsemi.com/, ComponentLink2Description=Datasheet, ComponentLink2URL=http://www.onsemi.cn/pub_link/Collateral/LM358-D.PDF, ComponentLink3Description="Package Specification", ComponentLink3URL=http://www.onsemi.com/pub_link/Collateral/751-07.PDF, DatasheetVersion="Rev. 27", Mounting Technology="Surface Mount", PackageDescription="8-Pin Small Outline Integrated Circuit, Body 4.9 x 3.9 mm, Pitch 1.27 mm", PackageReference=SOIC-8-751-07, PackageVersion="Rev. AK, 02/2011", Packing="Tape and Reel", PartNumber=LM358ADR2G, RoHS=TRUE, VCC Max (V)=32, VCC Min (V)=3
U4: "USB Interface Integrated Circuit", Package=None, Availability="Not in stock", Check_prices=https://www.snapeda.com/parts/Ch340G/WCH/view-part/?ref=eda, MF=WCH, MP=Ch340G, Price=None, SnapEDA_Link=https://www.snapeda.com/parts/Ch340G/WCH/view-part/?ref=snap
Y1: library part CRYSTAL-12MHZ, "CRYSTAL 12.0MHZ 16PF SMD", Frequency=12MHz, Load Capacitance=16pF, Manufacturer="IQD Frequency Products", Temperature="-10°C to +60°C", Temperature Range High=+60°C, Temperature Range Low=-10°C, Tolerance=30ppm, Automotive=No, Category=Crys, ComponentLink2Description=Datasheet, ComponentLink2URL=https://www.iqdfrequencyproducts.com/products/pn/LFXTAL003210Bulk.pdf, Device Class L1="Passive Components", Device Class L2="Crystals / Oscillators", Device Class L3=Crystals, Digikey Description="CRYSTAL 12.0MHZ 16PF SMD", Esr=40Ω, Height=4.3mm, Lead Free=Yes, Manufacturer Part Number=LFXTAL003210BULK, Octopart=https://octopart.com/lfxtal003210bulk-iqd+frequency+products-20904063, Package=LFXTAL003210BULK, RoHS=TRUE, Series=HC49/4HSMX, Stability=50ppm
Y2: library part CRYSTAL-16MHZ, "CRYSTAL 16.0000MHZ 18PF SMD", Frequency=16MHz, Load Capacitance=18pF, Manufacturer=Abracon, Package=ABLS, Temperature="-40°C to +125°C", Temperature Range High=+125°C, Temperature Range Low=-40°C, Tolerance=30ppm, Automotive=No, Category=Crys, ComponentLink2Description=Datasheet, ComponentLink2URL=https://abracon.com/Resonators/abls.pdf, Device Class L1="Passive Components", Device Class L2="Crystals / Oscillators", Device Class L3=Crystals, Digikey Description="CRYSTAL 16.0000MHZ 18PF SMD", Esr=40Ω, Height=4.3mm, Lead Free=Yes, Manufacturer Part Number=ABLS-16.000MHZ-K4T, Mouser Description="Crystal 16MHz ±30ppm (Tol) ±50ppm (Stability) 18pF FUND 40Ohm 2-Pin HC-49/US SMD T/R", Octopart=https://octopart.com/abls-16.000mhz-k4t-abracon-18618626, RoHS=TRUE, Series=ABLS, Stability=50ppm, Standoff Height=0mm

## Free pads (board coordinates)
  round 1.5 / inner round 1.524 / far side round 0 all layers, no hole mask+0.105: ""(4.2,10.7) ""(39.2,37.1) ""(68,27.7)
  round 3 hole 3: ""(73.7,9.1)

## Via types
v1: diameter 0.5, hole 0.3, Top Layer to Bottom Layer, tented both sides, 127 vias

## Nets (pads, with @x,y where several pads share a name; then routed paths per layer and width w, separated by ;. In a path a pad name is that pad's centre, name@x,y a point inside that pad or via, vN(x,y) a via of type N, cw(c..) or ccw(c..) an arc to the next point about the centre after c; other vN are vias at no path point)
+5V: BUZZER1.2 C6.1 C7.1 C8.1 C11.1 C12.2 D2.1 D4.2 D5.2 D6.1 J3.2 LCD1.2 R1.2 R2.2 R6.2 R12.2 R13.2 R14.2 R15.2 R16.2 U1.4 U1.6 U1.18 U3.8 U4.16 | length 319.7
  Top Layer w0.3: C7.1@9.3,23.1 U1.6 ; C8.1@11.9,24.7 U1.4 ; R12.2 v1(16.6,6) ; R1.2 v1(20.6,53) ; U1.18@24.45,22.3 C6.1@27.074,22.3 ; v1(29.6,9.5) R6.2 ; R13.2 v1(32.7,6) ; v1(46.113,11.387) 46.113,10.068 C11.1 U4.16 ; D2.1 48.71,53 51.2,53 51.9,53.7 51.9,57.2 52.84,58.14 U3.8 U3.8@54.86,58.12 ; D5.2 47.35,32 ; R14.2 v1(48.9,5.9) ; 54.113,31.9 54.113,25.712 D4.2 ; C12.2 63.113,9.6 ; D6.1 60.42,28.2 61.11,27.51 61.11,27.5 63.113,25.497 63.113,9.6 ; R15.2 v1(64.9,6.1) ; v1(67.5,9.6) 63.113,9.6 ; v1(77.2,7.5) 78.5,7.5 R16.2
  Top Layer w0.6: C7.1 8.974,23.4 8.2,23.4 7.8,23.8 7.8,27.9 8.5,28.6 10.3,28.6 10.4,28.5 ; C8.1 11.874,24.7 11,24.7 10.4,25.3 10.4,28.5 ; LCD1.2 10.4,54.529 10.4,53 ; v1(13.6,28.5) 10.4,28.5 ; R2.2 10.4,53 ; C6.1 27.074,21.051 27.426,20.7 30,20.7 30.5,21.2 30.5,27.8 v1(29.8,28.5) ; v1(44.3,50.7) 45.23,49.77 45.23,49.52 ; D2.1 46.9,51.2 46.36,50.66 46.36,50.65 45.23,49.52 ; D6.1 60.4,28.2 59.86,28.74 59.86,28.75 56.61,32 47.35,32 45.8,32 44.1,33.7 44.1,48.39 45.23,49.52 ; 10.4,28.5 10.4,53
  Bottom Layer w0.3: v1(16.6,6) 17.35,6.75 22.8,6.75 ; v1(20.6,53) 20.6,59.1 ; J3.2 22.84,6.79 22.8,6.75 ; v1(29.6,9.5) 29.6,6.75 ; v1(32.7,6) 32.7,6.75 ; v1(46.113,11.387) 46.113,6.763 46.1,6.75 ; v1(48.9,5.9) 48.9,6.75 ; v1(64.9,6.1) 64.9,6.75 ; v1(67.5,9.6) 67.5,6.75 ; v1(77.2,7.5) 76.45,6.75 67.5,6.75 ; 22.8,6.75 29.6,6.75 ; 29.6,6.75 32.7,6.75 ; 32.7,6.75 46.1,6.75 ; 46.1,6.75 48.9,6.75 ; 48.9,6.75 64.9,6.75 ; 64.9,6.75 67.5,6.75
  Bottom Layer w0.6: LCD1.2 12.781,58.081 13.8,59.1 20.6,59.1 36.2,59.1 39.2,56.1 BUZZER1.2 43.6,51.4 v1(44.3,50.7) ; v1(13.6,28.5) v1(29.8,28.5)
+12V: C1.2 C2.1 D1.1 R4.2 U2.1 | length 60.4
  Top Layer w0.6: v1(43,42.6) 42.1,43.5 42.1,51 45.3,54.2 46.45,54.2 R4.2 ; v1(58.2,41.2) 65,41.2 65.8,42 U2.1 66.076,45.326 67.6,45.326 ; D1.1@69.8,48.22 D1.1 C2.1 67.6,45.326 ; C1.2 70.85,39.25 67.6,42.5 67.6,45.326
  Bottom Layer w0.6: v1(43,42.6) 44.4,41.2 v1(58.2,41.2)
BT_MON: U1.23 U3.1 U3.2 | length 58.9
  Top Layer w0.3: U1.23 25.6,26.3 27.8,28.5 27.8,57.923 29.4,59.523 48.677,59.523 49.36,58.84 U3.1 U3.2
BUZZER: R3.2 U1.11 | length 37.9
  Top Layer w0.3: v1(18.3,18.4) U1.11 ; v1(33.8,20.7) R3.2
  Bottom Layer w0.3: v1(18.3,18.4) 32.4,18.4 33.8,19.8 v1(33.8,20.7)
DTR: C10.1 U4.13 | length 17.4
  Top Layer w0.3: C10.1 44.808,11.408 47.265,13.865 U4.13
GND: C1.1 C2.2 C3.1 C4.1 C5.2 C6.2 C7.2 C8.2 C9.1 C11.2 C13.1 C14.1 C15.2 C16.2 C17.2 C18.2 C19.2 C20.2 C21.2 D3.2 J1.1 J2.4 J2.5 J2.6 J3.6 LCD1.1 Q1.2 R5.1 SW1.3 SW2.3 SW3.3 SW4.3 SW5.3 SW6.3 U1.3 U1.5 U1.21 U2.3 U2.5 U2.6 U3.4 U4.1 | length 5.9
  Top Layer w0.3: v1(13.3,23.9) U1.5 ; v1(13.3,25.5) U1.3 ; U1.21 v1(25.7,24.7)
  other v1: 6.606,1.41 16.606,1.41 21.606,1.41 31.606,1.41 36.606,1.41 41.606,1.41 46.606,1.41 56.606,1.41 61.606,1.41 71.606,1.41 4.106,6.41 9.106,6.41 35.3,10.1 37.4,10.1 39.3,10.1 49.9,10.5 51.4,10.5 58.1,11.3 1.606,11.41 6.606,11.41 71.606,11.41 76.606,11.41 29.106,16.41 39.106,16.41 69.106,16.41 74.106,16.41 79.106,16.41 36.606,21.41 41.606,21.41 46.606,21.41 56.606,21.41 66.606,21.41 71.606,21.41 76.606,21.41 19.106,26.41 29.106,26.41 39.106,26.41 59.106,26.41 64.106,26.41 69.106,26.41 74.106,26.41 79.106,26.41 9,27.4 1.606,31.41 6.606,31.41 11.606,31.41 16.606,31.41 36.606,31.41 41.606,31.41 66.606,31.41 71.606,31.41 76.606,31.41 4.106,36.41 9.106,36.41 14.106,36.41 19.106,36.41 24.106,36.41 29.106,36.41 74.106,36.41 1.606,41.41 6.606,41.41 11.606,41.41 16.606,41.41 21.606,41.41 26.606,41.41 36.606,41.41 41.606,41.41 66.606,41.41 71.606,41.41 76.606,41.41 4.106,46.41 9.106,46.41 14.106,46.41 19.106,46.41 24.106,46.41 29.106,46.41 34.106,46.41 39.106,46.41 74.106,46.41 79.106,46.41 1.606,51.41 6.606,51.41 11.606,51.41 16.606,51.41 21.606,51.41 26.606,51.41 31.606,51.41 36.606,51.41 56.606,51.41 66.606,51.41 14.106,56.41 19.106,56.41 29.106,56.41 34.106,56.41 44.106,56.41 69.106,56.41 74.106,56.41 79.106,56.41
MISO: J3.1 U1.16 | length 5.9
  Top Layer w0.3: U1.16 22.3,19.375 22.84,18.835 J3.1
MOSI: J3.4 U1.15 | length 8.7
  Top Layer w0.3: J3.4 21.5,13 U1.15
NetBUZZER1_1: BUZZER1.1 Q1.3 | length 13.4
  Top Layer w0.3: Q1.3 30.7,47.9 BUZZER1.1
NetC3_2: C3.2 C4.2 C5.1 D2.2 L1.2 U2.4 | length 36.5
  Top Layer w0.6: D2.2 C5.1 53.874,49.6 ; C4.2 53.85,35.3 C3.2 53.874,44.724 53.874,49.6 ; L1.2@58.2,54.7 58.35,54.7 60.7,52.35 60.7,49.6 ; U2.4 60.7,49.6 ; 53.874,49.6 60.7,49.6
NetC9_2: C9.2 U1.20 | length 2.7
  Top Layer w0.3: U1.20@24.45,23.9 26.974,23.9 C9.2
NetC12_1: C12.1 U4.4 | length 6.5
  Top Layer w0.381: U4.4 54.935,13.865 55.2,13.6 55.2,11.626 C12.1@57.3,9.526
NetC13_2: C13.2 U4.7 Y1.1 | length 11.2
  Top Layer w0.3: U4.7 58.145,17.675 59.6,16.22 Y1.1@59.6,14.47 ; C13.2 59.576,13.626 Y1.1@59.6,13.65
NetC14_2: C14.2 U4.8 Y1.2 | length 11.4
  Top Layer w0.3: U4.8 57.745,18.945 59.6,20.8 Y1.2@59.6,22.55 ; C14.2 Y1.2@59.6,23.15
NetC15_1: C15.1 R11.2 U1.7 Y2.2 | length 20.9
  Top Layer w0.3: R11.2 C15.1 Y2.2 4.9,24.9 7.5,22.3 U1.7
NetC16_1: C16.1 R11.1 U1.8 Y2.1 | length 20.9
  Top Layer w0.3: R11.1 C16.1 Y2.1 4.9,18.9 7.5,21.5 U1.8
NetD1_2: D1.2 S1.3 | length 4.5
  Top Layer w0.6: D1.2 72.01,51.79 72.596,51.204 72.596,49.704 S1.3
NetD3_1: D3.1 L1.1 U2.2 | length 13
  Top Layer w0.6: U2.2 L1.1@64.1,54.4 ; L1.1 68.09,54.5 D3.1
NetD4_1: D4.1 R7.2 | length 2
  Top Layer w0.381: D4.1 52.488,25.687 52.488,23.713 R7.2
NetD5_1: D5.1 R8.2 | length 2
  Top Layer w0.381: R8.2 D5.1
NetD6_2: D6.2 J2.1 | length 9.1
  Top Layer w0.6: D6.2 64,28.2 65,27.2 65,19.705 J2.1
NetJ1_2: J1.2 S1.2 | length 11.2
  Top Layer w0.6: S1.2 74.6,47.2 76.3,48.9 J1.2
NetQ1_1: Q1.1 R3.1 | length 2.2
  Top Layer w0.3: Q1.1 R3.1
NetR4_1: R4.1 R5.2 U3.3 | length 4.4
  Top Layer w0.6: R5.2 R4.1 U3.3
NetR9_1: R9.1 U4.3 | length 11.6
  Top Layer w0.3: R9.1 52.5,21.9 52.341,21.74 52.241,21.74 51.6,21.1 51.6,13.3 52.305,12.595 U4.3
NetR10_1: R10.1 U4.2 | length 14.3
  Top Layer w0.3: R10.1 49.8,22 49.9,21.9 50.7,21.1 50.7,12.4 51.775,11.325 U4.2
PB1: C17.1 R12.1 SW2.2 U1.9 | length 25
  Top Layer w0.3: SW2.2@11.35,6.54 11.094,6.54 9.1,8.534 9.1,16.7 12.393,19.993 16.643,19.993 U1.9 ; R12.1 R12.1@14.1,6.04
  Top Layer w0.6: SW2.2@11.35,6.04 R12.1@14.1,6.04 ; C17.1 R12.1
PB2: C18.1 R13.1 SW3.2 U1.10 | length 40.5
  Top Layer w0.3: U1.10 17.5,18.6 17.2,18.3 11.9,18.3 9.9,16.3 9.9,9.2 12.01,7.09 26.24,7.09 26.79,6.54 SW3.2@27.55,6.54
  Top Layer w0.6: SW3.2@27.55,6.04 R13.1@30.2,6.04 ; C18.1 R13.1
PB3: C21.1 R14.1 SW4.2 U1.12 | length 56
  Top Layer w0.3: U1.12 19.1,18 18.5,17.4 12.5,17.4 10.7,15.6 10.7,10 12.929,7.771 42.159,7.771 43.39,6.54 SW4.2@43.75,6.54
  Top Layer w0.6: SW4.2@43.75,5.94 R14.1@46.2,5.94 ; C21.1 46.375,3.951 46.375,5.875 R14.1
PB4: C19.1 R15.1 SW5.2 U1.13 | length 69.9
  Top Layer w0.3: U1.13 19.9,17.7 18.8,16.6 13.4,16.6 12,15.2 12,10.4 14.129,8.271 57.859,8.271 59.59,6.54 SW5.2@59.95,6.54 ; R15.1@62.34,6.04 R15.1 ; C19.1@62.4,4.401 C19.1
  Top Layer w0.6: SW5.2@59.95,6.04 R15.1@62.34,6.04 ; C19.1@62.4,4.401 R15.1
PB5: C20.1 R16.1 SW6.2 U1.14 | length 82.8
  Top Layer w0.3: U1.14 20.7,17.4 19.3,16 14.9,16 13.4,14.5 13.4,11.537 16.166,8.771 70.929,8.771 73.66,6.04 SW6.2
  Top Layer w0.6: SW6.2 R16.1@78.6,6.04 ; C20.1@78.6,4.826 R16.1
RST: C10.2 J3.5 R6.1 SW1.2 U1.29 | length 56.4
  Top Layer w0.3: U1.29 v1(19.1,31.3) ; R6.1@29.6,12.874 30.75,12.874 ; v1(30.7,10.2) 30.7,12.824 30.75,12.874 ; C10.2 C10.2@31.9,12.874 ; v1(31.9,31.3) C10.2@31.9,12.874 ; SW1.2@34.65,12.86 34.636,12.874 C10.2@31.9,12.874 ; 30.75,12.874 C10.2@31.9,12.874
  Bottom Layer w0.3: J3.5 18.91,13.19 25.5,13.19 28.49,10.2 v1(30.7,10.2) ; v1(19.1,31.3) v1(31.9,31.3)
RXD: R8.1 R10.2 U1.30 | length 38.9
  Top Layer w0.3: U1.30 v1(18.3,30.6) ; v1@44.7,30.724 44.7,25.7 46.7,23.7 R8.1 R10.2
  Bottom Layer w0.3: v1(18.3,30.6) 44.546,30.6 44.646,30.7 v1(44.7,30.7)
SCK: J3.3 U1.17 | length 10.5
  Top Layer w0.3: U1.17 23.8,21.45 v1(23.8,16.1)
  Bottom Layer w0.3: J3.3 20.3,15.8 20.6,16.1 v1(23.8,16.1)
SCL: LCD1.3 R2.1 U1.28 | length 30.3
  Top Layer w0.3: LCD1.3 R2.1 15.32,36.68 19.9,32.1 U1.28
SDA: LCD1.4 R1.1 U1.27 | length 29.5
  Top Layer w0.3: LCD1.4 R1.1 17.86,35.54 20.7,32.7 U1.27
TXD: R7.1 R9.2 U1.31 | length 48
  Top Layer w0.3: U1.31 v1(17.5,30) ; R9.2 53.9,23.8 55.4,25.3 v1(55.4,30)
  Bottom Layer w0.3: v1(17.5,30) v1(55.4,30)
UD_N: J2.2 U4.6 | length 24.4
  Top Layer w0.381: U4.6 55.195,16.405 v1(55.2,16.4)
  Bottom Layer w0.381: v1@55.223,16.377 55.835,15.765 55.835,10.663 56.496,10.002 65.004,10.002 65.527,10.526 65.527,16.292 64.845,16.975 J2.2
UD_P: J2.3 U4.5 | length 25
  Top Layer w0.381: U4.5 55.127,15.135 55.162,15.1 v1(55.194,15.1)
  Bottom Layer w0.381: v1(55.194,15.1) 55.2,15.095 55.2,10.4 56.233,9.367 65.267,9.367 66.162,10.262 66.162,16.292 66.845,16.975 J2.3
pads on no net: LCD1. S1.1 SW1.1 SW1.4 SW2.1 SW2.4 SW3.1 SW3.4 SW4.1 SW4.4 SW5.1 SW5.4 SW6.1 SW6.4 U1.1 U1.2 U1.19 U1.22 U1.24 U1.25 U1.26 U1.32 U3.5 U3.6 U3.7 U4.9 U4.10 U4.11 U4.12 U4.14 U4.15

## Polygon pours and split planes (outlines as drawn)
GND on Top Layer (solid, pour order 0): 0,0 0,60 80,60 80,0
GND on Bottom Layer (solid, pour order 1): 0,0 0,60 80,60 80,0

## Keep-outs
Keep-Out Layer:
  lines w0.254: 59.241,0 76.5,0 ; 0,0 0,60 80,60 80,0 0,0

## Silkscreen, mask and mechanical layers (free items; w line width, h text height)
Top Overlay:
  text "POWER" at 71.4,59.387 h0.8 r270
  text "ON" at 70.513,51.7 h0.8
  text "OFF" at 70.513,41.3 h0.8
  text "1404/05/07" at 69.735,28.4 h0.8
  text "Alireza Nami" at 69.517,26.5 h0.8
  text "ZLAB" at 26.436,25.9 h3
  text "RESET" at 40.813,18.7 h0.8
  text "PROGRAMMER" at 10.9,17.765 h0.8 r270